# Altium PCB P-MT3620EXMSTLP-1-0.PcbDoc (part 3 of 3)
Units mm, origin at the board's own origin, x right, y up, seen from the top; angles counter-clockwise.
Board outline 50 x 80 mm, 4 copper layers (Top Layer, InternalGND, InternalPWR, Bottom Layer), stack 1.534 mm thick; 92 components, 85 nets, 375 pads, 250 vias.
Unrouted connection lines stored in the file: 17.
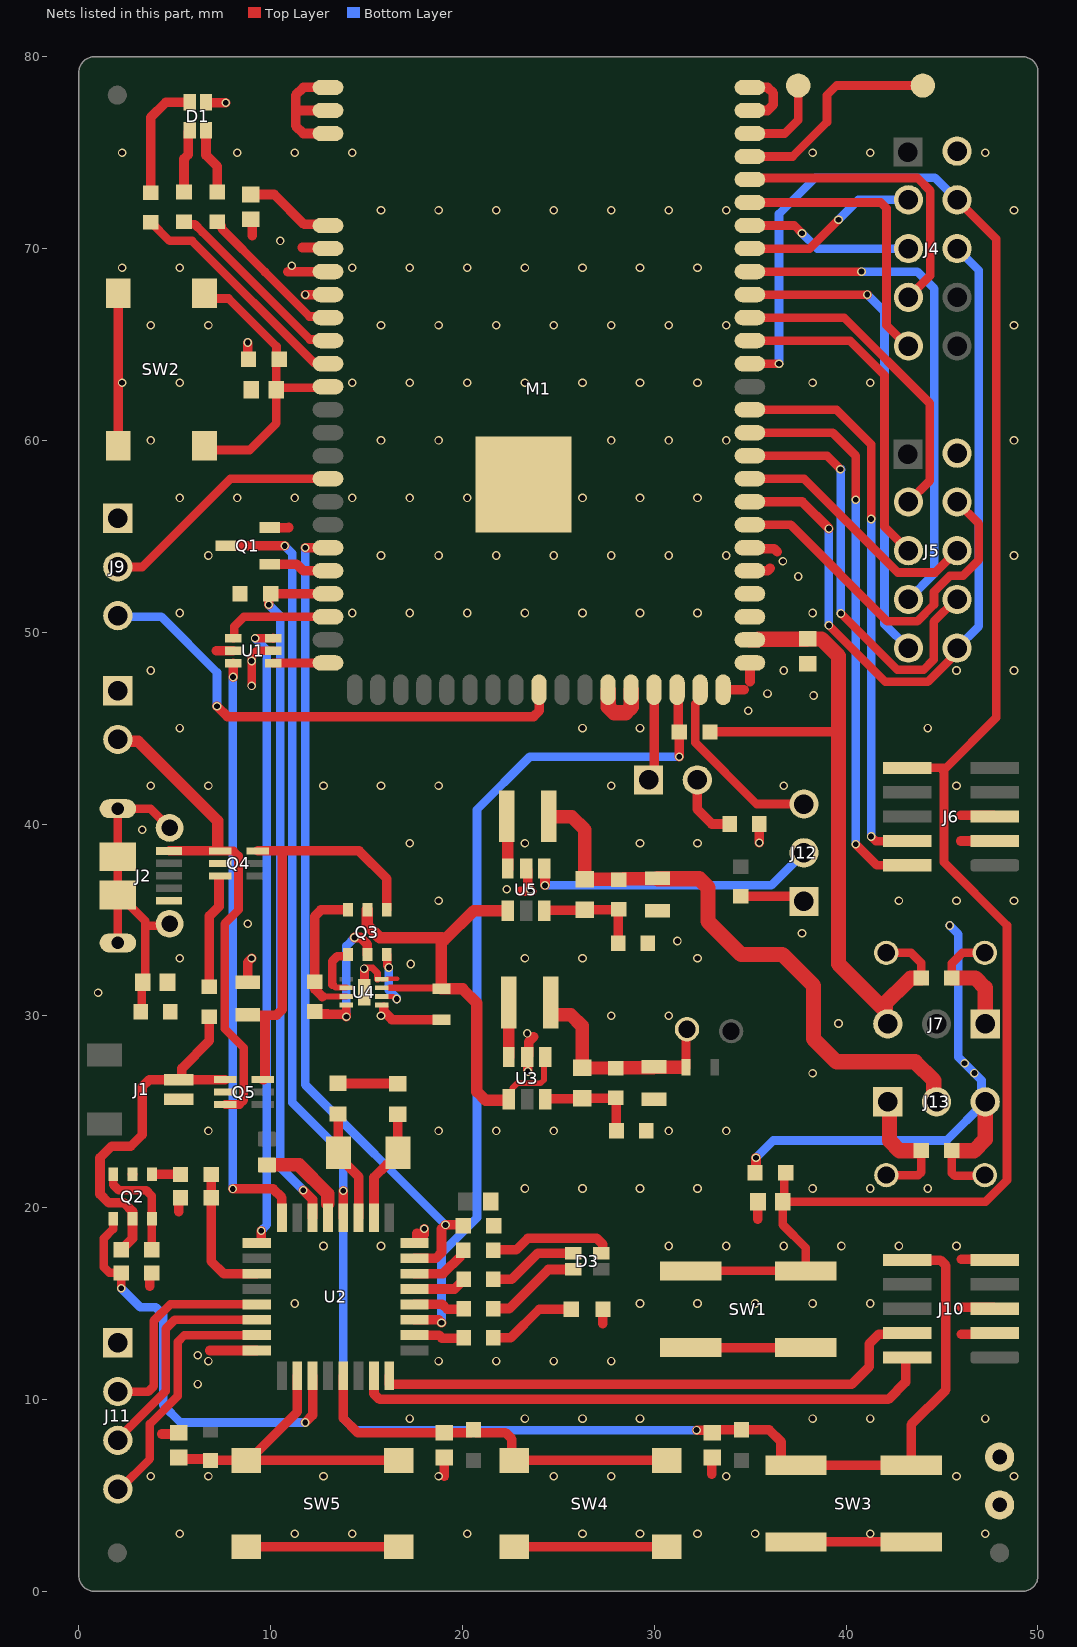
[diagram p4: the nets of this part, all layers, seen from the top]

## Via types
v1: diameter 0.45, hole 0.3, Top Layer to Bottom Layer, tented both sides, 250 vias

## Nets (pads, with @x,y where several pads share a name; then routed paths per layer and width w, separated by ;. In a path a pad name is that pad's centre, name@x,y a point inside that pad or via, vN(x,y) a via of type N, cw(c..) or ccw(c..) an arc to the next point about the centre after c; other vN are vias at no path point) (continued)
3V3_MT3620: C3.2 D1.4 J13.3 M1.2 M1.3 M1.42 M1.43 R2.2 R4.2 R27.2 TP6.1 U1.5 | length 42.3
  Top Layer w0.45: v1(9,47.2) 9,48.746 9.293,49.039 10.136,49.039 U1.5@10.138,49.037 ; R27.2@45.51,22.975 45.51,21.808 45.656,21.661 TP6.1@47.191,21.661
  Top Layer w0.5: D1.4@6.625,77.625 6.65,77.6 v1(7.657,77.6) ; v1(8.8,65.1) 8.8,64.273 R4.2@8.837,64.236 ; C3.2@8.964,71.524 9.032,71.456 9.032,70.668 ; 10.9,68.8 M1.3@12.984,68.8 ; 11.638,70.057 12.927,70.057 M1.2@12.984,70 ; M1.42@34.984,53.2 35.9,53.2 36.027,53.327 ; M1.43@34.984,54.4 35.041,54.343 36.257,54.343 36.4,54.2 ; R2.2@35.249,21.809 35.3,21.86 v1(35.3,22.6)
  Top Layer w0.6: R27.2@45.646,22.975 R27.2@45.66,22.961
  Top Layer w0.8: R27.2@45.66,22.961 46.66,22.961 47.25,23.551 J13.3@47.25,25.515
  Bottom Layer w0.45: v1(35.3,22.6) 36.2,23.5 45.234,23.5 J13.3@47.25,25.515 47.054,25.711 47.054,26.646 45.847,27.853 45.847,34.259 v1(45.4,34.706)
  other v1: 46.686,27.014 46.172,27.528 9,48.5 37.5,52.9 36.7,53.7 11.1,69.1 10.5,70.4
3V3_MT3620_RTC: C4.2 J7.3 M1.39 R3.2 R5.2 TP2.1 | length 37.8
  Top Layer w0.45: TP2.1@42.092,33.283 43.377,33.283 43.91,32.75 R3.2@43.91,31.975
  Top Layer w0.5: R5.2@32.9,44.8 39.6,44.8
  Top Layer w0.8: M1.39@34.984,49.6 35.384,49.6 35.419,49.635 37.937,49.635 37.949,49.648 C4.2@38,49.648 38.006,49.641 38.715,49.641 39.6,48.757 39.6,44.8 39.6,32.7 J7.3@42.031,30.269 ; 41.85,30.45 43.375,31.975 R3.2@43.91,31.975 ; 42.031,30.631 42.031,29.718 J7.3@42.17,29.579
BATTERY_LEVEL: R20.1 R22.2 U2.11 | length 7
  Top Layer w0.5: R20.1@6.896,21.59 6.896,20.32 6.896,17.204 7.545,16.555 U2.11@9.266,16.555
DEBUG_CTS: J5.8 M1.47 | length 22.5
  Top Layer w0.45: M1.47@34.984,59.2 39,59.2 v1(39.7,58.5) ; v1(39.725,50.978) 42.67,48.033 44.033,48.033 44.559,48.559 44.559,50.542 45.727,51.71 J5.8@45.783,51.71
  Bottom Layer w0.45: v1(39.725,50.978) v1@39.725,58.475
  Bottom Layer w0.5: v1(39.7,58.5) v1@39.725,58.475
DEBUG_RTS: J4.6 J5.10 M1.45 | length 40.3
  Top Layer w0.45: v1(39.1,50.353) 42.045,47.408 44.257,47.408 45.783,48.934 J5.10@45.783,49.17
  Top Layer w0.5: M1.45@34.984,56.8 37.7,56.8 v1(39.1,55.4)
  Bottom Layer w0.45: v1(39.1,50.353) v1(39.1,55.4) ; J5.10@45.783,49.17 46.92,50.307 46.92,68.863 J4.6@45.783,70
DEBUG_RXD: J5.4 M1.44 | length 19.2
  Top Layer w0.45: M1.44@34.984,55.6 37.105,55.6 42.132,50.573 43.714,50.573 44.579,51.439 44.579,52.114 45.411,52.947 46.087,52.947 46.92,53.779 46.92,55.653 J5.4@45.783,56.79
DEBUG_TXD: J5.6 M1.46 | length 13.3
  Top Layer w0.45: M1.46@34.984,58 37.8,58 42.687,53.113 44.646,53.113 J5.6@45.783,54.25
EXT_PMU_EN: J12.3 M1.36 | length 9.9
  Top Layer w0.45: M1.36@32.384,47 32.384,46.519 32.125,46.26 32.125,44.245 35.33,41.04 J12.3@37.8,41.04
FLASH_STM32: M1.15 R14.2 U2.31 | length 43.5
  Top Layer w0.5: v1(11.8,54.4) M1.15@12.984,54.4 ; U2.31@17.496,17.355 17.5,17.359 18.607,17.359 18.9,17.652 18.9,18.9 19.1,19.1 19.878,19.1 R14.2@19.978,19
  Bottom Layer w0.45: v1(11.8,54.4) 11.8,26.409 v1(19.11,19.099)
GND: C1.1 C2.1 C3.1 C4.1 C5.1 C6.1 C7.1 C8.1 C9.1 C10.1 C11.1 C12.1 C14.1 C16.1 C17.1 D2.1 J1.2 J2.5 J3.1 J4.2 J5.2 J6.3 J6.5 J9.1 J10.3 J10.5 J10.9 J11.1 M1.1 M1.4 M1.37 M1.38 M1.40 M1.41 M1.62 M1.63 M1.64 M1.65 M1.66 M1.67 pad.4 Q1.2 Q2.5 Q4.2 Q5.2 R1.2 R6.1 R7.1 R14.1 R22.1 R23.1 R25.1 R31.1 SW1.2 SW1.4 SW2.3 SW2.4 SW3.1 SW3.3 SW4.1 SW4.2 SW5.1 SW5.2 U1.2 U2.16 U2.32 U3.2 U4.1 U4.4 U4.9 U5.2 | length 89.9
  Top Layer w0.25: U4.4@15.794,31.908 16.019,31.908 16.044,31.933 16.591,31.933
  Top Layer w0.35: v1@14.905,32.501 15.301,32.501 15.569,32.233 U4.4@15.569,31.908
  Top Layer w0.45: U4.9@14.889,31.253 v1@14.889,32.328
  Top Layer w0.5: SW2.4@2.05,59.725 SW2.3@2.05,67.675 ; Q2.5@2.794,21.737 Q2.5@2.798,21.741 ; 3.7,15.9 3.7,16.492 R23.1@3.8,16.592 ; 4.325,8.2 5.135,8.2 C11.1@5.201,8.266 ; 5.2,19.8 5.2,20.41 R22.1@5.296,20.506 ; 6.825,12.553 7.986,12.553 ; 7.167,49.039 8.036,49.039 U1.2@8.038,49.037 ; 7.995,12.562 7.986,12.553 ; SW5.2@8.725,2.322 SW5.1@16.675,2.322 ; C16.1@8.8,31.75 8.8,32.8 v1(9,33) ; C3.1@8.964,72.819 10.181,72.819 11.743,71.257 12.927,71.257 M1.1@12.984,71.2 ; U2.16@9.266,12.555 9.264,12.553 7.986,12.553 ; Q1.2@9.943,55.453 10.941,55.453 10.945,55.456 ; v1(11.8,67.6) M1.4@12.984,67.6 ; M1.64@12.984,76 11.7,76 11.3,76.4 11.3,77.2 ; M1.65@12.984,77.2 11.3,77.2 ; M1.66@12.984,78.4 11.7,78.4 11.3,78 11.3,77.2 ; C9.1@13.512,26.484 13.524,26.472 16.607,26.472 C8.1@16.619,26.461 ; U4.1@15.894,30.433 15.894,30.218 16.312,29.8 C14.1@18.9,29.8 ; U2.32@17.496,18.155 17.619,18.155 17.623,18.159 17.623,18.663 ; 17.982,18.582 18,18.6 v1(18,18.9) ; 19.048,5.992 19.05,5.994 C10.1@19.05,6.972 ; SW4.2@22.695,2.322 SW4.1@30.645,2.322 ; 23,36.5 23.6,36.5 23.389,36.711 23.389,37.601 U5.2@23.314,37.676 ; v1(23.4,27.1) 23.4,27.584 23.434,27.618 23.365,27.687 23.4,27.722 23.368,27.754 23.4,27.786 23.382,27.804 23.4,27.822 U3.2@23.368,27.854 23.443,27.929 23.443,28.643 23.7,28.9 ; 27.309,13.95 27.309,14.666 27.3,14.675 D2.1@27.325,14.7 ; SW1.2@31.9,12.7 SW1.4@37.9,12.7 ; 33,6.1 33,6.952 C7.1@33.02,6.972 ; M1.37@33.584,47 34.678,47 ; 34.984,47.429 M1.38@34.984,48.4 ; M1.62@34.984,77.2 35.9,77.2 36.2,77.5 36.2,78.1 35.9,78.4 M1.63@34.984,78.4 ; 35.4,19.4 35.4,20.308 C2.1@35.401,20.309 ; v1(35.473,39.023) 35.473,39.947 35.5,39.975 R7.1@35.475,40 ; SW3.3@37.386,2.572 SW3.1@43.386,2.572 ; 45.981,39.117 45.982,39.116 J6.3@47.752,39.116 ; 45.985,40.447 47.691,40.447 J6.5@47.752,40.386 ; 46,13.4 47.69,13.4 J10.3@47.752,13.462 ; 46,14.8 47.684,14.8 J10.5@47.752,14.732 ; 46,17.3 47.724,17.3 J10.9@47.752,17.272
  other v1: 5.25,3 11.25,3 14.25,3 20.25,3 26.25,3 29.25,3 32.25,3 35.25,3 41.25,3 47.25,3 3.75,6 6.75,6 12.75,6 18.75,6 24.75,6 27.75,6 33.75,6 45.75,6 48.75,6 17.25,9 23.25,9 26.25,9 29.25,9 38.25,9 41.25,9 47.25,9 6.2,10.8 6.75,12 18.75,12 21.75,12 24.75,12 27.75,12 6.2,12.3 11.25,15 29.25,15 32.25,15 35.25,15 38.25,15 41.25,15 12.75,18 15.75,18 30.75,18 33.75,18 36.75,18 39.75,18 42.75,18 45.75,18 23.25,21 26.25,21 29.25,21 32.25,21 38.25,21 41.25,21 44.25,21 6.75,24 18.75,24 21.75,24 24.75,24 30.75,24 33.75,24 38.25,27 23.368,29.083 39.6,29.6 15.75,30 27.75,30 30.75,30 1,31.2 14.867,32.462 17.3,32.7 5.25,33 23.25,33 26.25,33 32.25,33 31.2,33.9 37.7,34.3 8.8,34.8 18.75,36 42.75,36 45.75,36 48.75,36 23.524,36.576 22.3,36.6 17.25,39 23.25,39 29.25,39 32.25,39 3.3,39.7 3.75,42 6.75,42 12.75,42 15.75,42 18.75,42 27.75,42 36.75,42 45.75,42 5.25,45 26.25,45 29.25,45 44.25,45 34.9,45.9 38.3,46.7 35.9,46.8 3.75,48 36.75,48 45.75,48 48.75,48 5.25,51 14.25,51 17.25,51 20.25,51 23.25,51 26.25,51 29.25,51 32.25,51 38.25,51 6.75,54 15.75,54 18.75,54 21.75,54 24.75,54 27.75,54 30.75,54 33.75,54 48.75,54 5.25,57 8.25,57 11.25,57 14.25,57 17.25,57 20.25,57 26.25,57 29.25,57 32.25,57 3.75,60 15.75,60 18.75,60 27.75,60 30.75,60 33.75,60 48.75,60 2.25,63 5.25,63 14.25,63 17.25,63 20.25,63 23.25,63 26.25,63 29.25,63 32.25,63 38.25,63 41.25,63 3.75,66 6.75,66 15.75,66 18.75,66 21.75,66 24.75,66 27.75,66 30.75,66 33.75,66 48.75,66 2.25,69 5.25,69 14.25,69 17.25,69 20.25,69 23.25,69 26.25,69 29.25,69 32.25,69 15.75,72 18.75,72 21.75,72 24.75,72 27.75,72 30.75,72 33.75,72 48.75,72 2.25,75 8.25,75 11.25,75 14.25,75 38.25,75 41.25,75 47.25,75
MEASURE_BATTERY: Q2.1 R23.2 U2.19 | length 22.4
  Top Layer w0.45: Q2.1@1.784,19.411 1.78,19.407 1.78,18.88 1.3,18.4 1.3,16.893 1.593,16.6 2.192,16.6 R23.2@2.2,16.592 2.2,16.442 v1(2.2,15.8)
  Top Layer w0.5: v1(11.8,8.8) 12.181,9.181 U2.19@12.181,11.24
  Bottom Layer w0.45: v1(2.2,15.8) 3.2,14.8 4,14.8 4.4,14.4 4.4,9.7 5.3,8.8 v1(11.8,8.8)
MT3620_BUTTON_A: C5.2 M1.8 R4.1 SW2.1 SW2.2 | length 16
  Top Layer w0.45: SW2.2@6.568,59.525 6.593,59.5 8.9,59.5 10.285,60.885 C5.2@10.285,62.651 ; SW2.1@6.568,67.475 6.643,67.4 7.8,67.4 10.3,64.9 10.3,64.373 R4.1@10.437,64.236 10.285,64.084 C5.2@10.285,62.651 ; M1.8@12.984,62.8 12.927,62.743 10.376,62.743 C5.2@10.285,62.651
MT3620_LED_B: M1.7 R9.2 | length 12.3
  Top Layer w0.45: R9.2@3.735,71.367 3.76,71.367 4.727,70.4 5.9,70.4 12.243,64.057 12.927,64.057 M1.7@12.984,64
MT3620_LED_G: M1.5 R8.1 | length 7.9
  Top Layer w0.45: R8.1@7.22,71.397 7.245,71.397 7.451,71.191 7.451,71.03 9.7,68.781 12.023,66.457 12.927,66.457 M1.5@12.984,66.4
MT3620_LED_R: M1.6 R10.1 | length 10.1
  Top Layer w0.45: R10.1@5.476,71.397 5.607,71.266 6.034,71.266 6.438,70.862 ; 6.438,70.861 12.041,65.257 12.927,65.257 M1.6@12.984,65.2
MT3620_RX: M1.20 U1.4 | length 2.8
  Top Layer w0.45: U1.4@10.144,48.394 M1.20@12.978,48.394
MT3620_SPARE1: J9.2 M1.12 | length 12.7
  Top Layer w0.45: J9.2@2.2,53.4 3.3,53.4 7.9,58 M1.12@12.984,58
MT3620_SPARE2: J9.3 M1.29 | length 26.4
  Top Layer w0.5: v1(7.2,46.14) 7.74,45.6 23.7,45.6 24,45.9 24,46.984 M1.29@23.984,47
  Bottom Layer w0.45: J9.3@2.025,50.86 2.086,50.8 4.3,50.8 7.2,47.9 v1(7.2,46.14)
MT3620_SWCLK: J6.4 M1.49 | length 29.5
  Top Layer w0.45: M1.49@34.984,61.6 39.5,61.6 41.3,59.8 v1(41.3,55.9) ; v1(41.3,39.35) 41.55,39.1 43.164,39.1 J6.4@43.18,39.116
  Bottom Layer w0.45: v1(41.3,39.35) v1(41.3,55.9)
MT3620_SWDIO: J6.2 M1.48 | length 29.5
  Top Layer w0.45: M1.48@35.041,60.343 M1.48@34.984,60.4 39.3,60.4 40.5,59.2 v1(40.5,56.9) ; v1(40.5,38.942) 41.596,37.846 J6.2@43.18,37.846
  Bottom Layer w0.45: v1(40.5,38.942) v1(40.5,56.9)
MT3620_SYSRST_N: C2.2 J4.4 J6.10 M1.51 R2.1 SW1.1 SW1.3 | length 100
  Top Layer w0.45: SW1.1@31.9,16.7 SW1.3@37.9,16.7 37.9,17.898 36.697,19.102 C2.2@36.697,20.309 ; M1.51@34.984,64 v1(36.5,64) ; R2.1@36.849,21.809 36.773,21.733 36.773,20.385 C2.2@36.697,20.309 ; J6.10@43.18,42.926 44.9,42.926 45.2,42.926 47.825,45.551 47.825,70.498 J4.4@45.783,72.54 ; 45.05,42.776 45.1,42.726 45.1,38 48.387,34.713 48.387,21.429 47.267,20.309 C2.2@36.697,20.309
  Bottom Layer w0.45: v1(36.5,64) 36.5,71.8 38.4,73.7 44.623,73.7 J4.4@45.783,72.54
MT3620_TX: M1.18 U1.1 | length 5.8
  Top Layer w0.45: U1.1@8.038,49.687 8.075,49.687 8.1,49.712 8.1,50.3 8.6,50.8 M1.18@12.984,50.8
NetC1_2: C1.2 J2.6 J2.7 J2.8 J2.9 J2.10 R1.1 | length 18
  Top Layer w0.45: J2.9@2.028,33.798 J2.6@2.028,36.298 J2.6@2.028,38.299 J2.10@2.028,40.799 3.728,40.799 J2.8@4.728,39.799 ; J2.6@2.125,36.277 3.454,34.948 3.454,34.7 ; R1.1@3.213,30.209 3.268,30.264 3.268,31.695 C1.2@3.323,31.75 ; C1.2@3.375,31.857 3.454,31.936 3.454,34.7 ; J2.7@4.728,34.799 4.63,34.7 3.454,34.7
NetC8_2: C8.2 U2.2 X1.1 | length 6
  Top Layer w0.5: U2.2@15.381,19.47 15.385,19.474 15.385,21.585 16.054,22.254 16.221,22.254 16.631,22.665 X1.1@16.631,22.855 16.625,22.861 16.625,24.855 C8.2@16.619,24.861
NetC9_2: C9.2 U2.3 X1.2 | length 5.9
  Top Layer w0.5: C9.2@13.512,24.884 13.522,24.874 13.522,22.865 X1.2@13.532,22.855 13.532,22.665 14.581,21.616 U2.3@14.581,19.47
NetC12_2: C12.2 C13.2 L1.2 R21.1 R24.2 TP3.1 | length 11.9
  Top Layer w0.45: R21.1@31.651,27.319 TP3.1@31.651,29.251
  Top Layer w0.7: L1.2@24.6,30.7 24.6,30.11 24.65,30.06 25.64,30.06 26.229,29.471 C13.2@26.229,27.293 26.242,27.28 27.966,27.28 R24.2@27.979,27.268 28.004,27.293 29.954,27.293 29.979,27.319 R21.1@31.526,27.319
NetC13_1: C13.1 R24.1 R25.2 U3.6 | length 5.4
  Top Layer w0.5: U3.6@24.318,25.654 24.337,25.673 26.21,25.673 C13.1@26.229,25.693 26.242,25.706 27.966,25.706 R24.1@27.979,25.718 28.002,25.695 28.002,24.023 R25.2@28.025,24
NetC14_2: C14.2 Q3.5 U3.1 U3.4 U4.3 U5.4 | length 26.7
  Top Layer w0.3: U3.4@22.418,25.654 22.593,25.829 22.593,26.221 22.856,26.484 24.067,26.484 24.243,26.66 24.243,27.779 U3.1@24.318,27.854
  Top Layer w0.36: 16.225,31.463 16.58,31.463 16.585,31.458 18.842,31.458 C14.2@18.9,31.4
  Top Layer w0.5: Q3.5@15.038,35.522 Q3.5@15.042,35.518
  Top Layer w0.6: Q3.5@15.042,35.518 15.042,34.71 15.677,34.075 18.925,34.075 19.05,33.95 ; U5.4@22.364,35.476 20.576,35.476 19.05,33.95 ; U3.4@22.418,25.654 22.418,25.625 22.393,25.6 21.2,25.6 20.75,26.05 20.75,30.65 20,31.4 C14.2@18.9,31.4 18.9,33.8 19.05,33.95
NetC15_1: C15.1 R29.1 R31.2 U5.6 | length 5.7
  Top Layer w0.5: U5.6@24.264,35.476 24.287,35.499 26.339,35.499 C15.1@26.362,35.522 26.375,35.535 R29.1@28.127,35.535 ; R31.2@28.115,33.782 28.127,33.795 R29.1@28.127,35.535 ; R29.1@28.14,35.547 R29.1@28.127,35.535
NetC15_2: C15.2 C17.2 J13.2 L2.2 R29.2 | length 31.2
  Top Layer w0.7: L2.2@24.5,40.386 25.686,40.386 26.362,39.71 C15.2@26.362,37.122 26.375,37.109 28.127,37.109 R29.2@28.14,37.097 28.171,37.128 28.378,37.128 28.398,37.148 C17.2@30.172,37.148
  Top Layer w0.8: C17.2@30.172,37.148 32.331,37.148 32.8,36.679 32.8,34.926 34.526,33.2 36.674,33.2 38.3,31.574 38.3,28.8 39.5,27.6 43.6,27.6 44.569,26.631 44.569,26.169 44.571,26.166 44.571,25.654 J13.2@44.71,25.515
NetC16_2: C16.2 Q3.4 Q4.6 Q5.6 | length 22.6
  Top Layer w0.5: C16.2@8.8,30.05 8.816,30.034 9.7,30.034 ; Q4.6@9.317,38.595 10.5,38.595 ; Q5.6@9.585,26.672 9.628,26.672 9.7,26.744 9.7,30.034 ; Q3.4@16.048,35.522 16.048,37.152 14.605,38.595 10.5,38.595 ; 9.7,30.034 10.307,30.034 10.6,30.327 10.6,38.495 10.5,38.595
NetD1_1: D1.1 R8.2 | length 3.5
  Top Layer w0.5: D1.1@6.625,76.175 6.625,74.875 7.22,74.28 R8.2@7.22,72.946
NetD1_2: D1.2 R10.2 | length 3.4
  Top Layer w0.5: R10.2@5.476,72.946 5.476,74.676 5.7,74.9 5.7,76.1 D1.2@5.775,76.175
NetD1_3: D1.3 R9.1 | length 6.3
  Top Layer w0.5: R9.1@3.735,72.916 3.735,76.835 4.525,77.625 D1.3@5.775,77.625
NetD2_2: D2.2 R11.1 | length 4.7
  Top Layer w0.5: R11.1@21.603,13.208 22.508,13.208 24,14.7 D2.2@25.675,14.7
NetD3_1: D3.1 R16.2 | length 5
  Top Layer w0.5: R16.2@21.603,14.732 21.612,14.741 22.441,14.741 24.475,16.775 D3.1@25.775,16.775
NetD3_2: D3.2 R17.2 | length 4.7
  Top Layer w0.5: R17.2@21.603,16.256 22.556,16.256 23.925,17.625 D3.2@25.775,17.625
NetD3_3: D3.3 R18.1 | length 6.6
  Top Layer w0.5: R18.1@21.59,17.78 21.61,17.8 22.8,17.8 23.4,18.4 27,18.4 27.3,18.1 27.3,17.7 D3.3@27.225,17.625
NetFB1_2: FB1.2 U2.5 | length 4.3
  Top Layer w0.7: FB1.2@9.8,22.225 11.475,22.225 12.981,20.719 U2.5@12.981,20.2
NetIO0_TXD_1: IO0_TXD.1 M1.60 | length 11.4
  Top Layer w0.45: M1.60@34.984,74.8 37.2,74.8 39,76.6 39,78 39.5,78.5 IO0_TXD.1@44,78.5
NetIO1_TXD_1: IO1_TXD.1 M1.61 | length 4.6
  Top Layer w0.45: M1.61@34.984,76 36.8,76 37.5,76.7 IO1_TXD.1@37.5,78.5
NetJ7_1: J7.1 R3.1 TP1.1 | length 6.5
  Top Layer w0.45: R3.1@45.51,31.975 45.51,32.727 46.065,33.283 TP1.1@47.224,33.283
  Top Layer w0.8: R3.1@45.51,31.975 46.73,31.975 47.25,31.455 J7.1@47.25,29.579
NetJ8_1: J8.1 M1.34 | length 4.8
  Top Layer w0.5: J8.1@29.7,42.3 29.984,42.584 M1.34@29.984,47
NetJ8_2: J8.2 R7.2 | length 3.5
  Top Layer w0.5: J8.2@32.24,42.3 32.24,40.76 33,40 R7.2@33.925,40
NetJ12_1: J12.1 R28.1 | length 3.4
  Top Layer w0.5: R28.1@34.5,36.225 37.535,36.225 J12.1@37.8,35.96
NetJ12_2: J12.2 U5.1 | length 15.1
  Top Layer w0.5: U5.1@24.264,37.676 24.3,37.64 v1(24.3,36.8)
  Bottom Layer w0.45: v1(24.3,36.8) 36.1,36.8 J12.2@37.8,38.5
NetJ13_1: J13.1 R27.1 TP5.1 | length 6.9
  Top Layer w0.45: TP5.1@42.095,21.696 43.763,21.696 43.91,21.842 R27.1@43.91,22.975
  Top Layer w0.6: J13.1@42.17,25.515 J13.1@42.256,25.429 ; R27.1@43.81,22.961 R27.1@43.824,22.975
  Top Layer w0.8: J13.1@42.256,25.429 42.256,23.487 42.782,22.961 R27.1@43.81,22.961
NetL1_1: L1.1 U3.3 | length 2.9
  Top Layer w0.6: L1.1@22.4,30.7 22.416,30.684 22.416,28.086 22.418,28.084 U3.3@22.418,27.854
NetL2_1: L2.1 U5.3 | length 2.8
  Top Layer w0.6: L2.1@22.214,40.386 22.364,40.236 U5.3@22.364,37.676
NetM1_32: M1.32 M1.33 | length 3.3
  Top Layer w0.8: M1.32@27.584,47 27.6,46.984 27.6,46.1 27.9,45.8 28.5,45.8 28.8,46.1 28.8,46.984 M1.33@28.784,47
NetQ2_3: Q2.3 Q2.6 R19.1 | length 5.6
  Top Layer w0.45: Q2.6@1.784,21.737 1.788,21.733 1.788,21.193 2.081,20.9 3.507,20.9 3.8,20.607 3.8,19.415 Q2.3@3.804,19.411 3.802,19.409 3.802,17.802 R19.1@3.8,17.8
NetQ2_4: Q2.4 R20.2 | length 1.5
  Top Layer w0.5: Q2.4@3.804,21.737 3.804,21.735 3.808,21.731 R20.2@5.296,21.731
NetQ3_1: Q3.1 U4.6 | length 3
  Top Layer w0.3: 13.222,31.63 13.378,31.473 U4.6@13.944,31.473
  Top Layer w0.45: 13.222,31.63 13.2,31.651 13.2,32.839 13.464,33.102 13.999,33.102 14.028,33.131 Q3.1@14.028,33.196
NetQ3_2: Q3.2 R26.1 U4.8 | length 7.8
  Top Layer w0.45: v1@13.944,30.092 13.944,30.425
  Top Layer w0.5: R26.1@12.3,30.225 12.431,30.094 12.96,30.094 12.963,30.092 13.944,30.092 v1(13.944,29.952) ; v1(14.367,34.083) 14.679,34.083 15.034,33.728 15.034,33.2 Q3.2@15.038,33.196
  Bottom Layer w0.45: v1(13.944,29.952) 13.944,33.644 14.367,34.067 v1(14.367,34.083)
NetQ3_3: Q3.3 U4.2 | length 3.3
  Top Layer w0.25: U4.2@15.794,31.008 16.391,31.008 v1@16.521,30.878
  Top Layer w0.45: Q3.3@16.048,33.196 16.077,33.167 16.077,32.602 v1(16.161,32.518)
  Bottom Layer w0.45: v1(16.161,32.518) 16.161,31.346 16.575,30.932 v1(16.575,30.878)
NetQ3_6: Q3.6 R26.2 U4.7 | length 7.5
  Top Layer w0.3: 12.686,31.008 U4.7@13.944,31.008
  Top Layer w0.5: 12.686,31.008 12.3,31.394 R26.2@12.3,31.775 12.3,35.2 12.622,35.522 Q3.6@14.028,35.522
NetQ4_3: Q4.3 R30.2 | length 5.9
  Top Layer w0.5: R30.2@6.804,31.509 6.804,35.204 7.3,35.7 Q4.3@7.3,37.192
RECOVERY_CTS: J4.7 M1.59 | length 15.7
  Top Layer w0.45: M1.59@34.984,73.6 35.041,73.657 35.654,73.657 35.673,73.677 43.714,73.677 44.38,73.011 44.38,68.597 J4.7@43.243,67.46
RECOVERY_RTS: J4.9 M1.58 | length 14.9
  Top Layer w0.45: M1.58@34.984,72.4 41.807,72.4 42.1,72.107 42.1,66 43.18,64.92 J4.9@43.243,64.92
RECOVERY_RXD: J4.3 M1.56 | length 9.3
  Top Layer w0.45: M1.56@34.984,70 38.1,70 v1(39.6,71.5)
  Bottom Layer w0.45: v1(39.6,71.5) 40.64,72.54 J4.3@43.243,72.54
RECOVERY_TXD: J4.5 M1.57 | length 8.8
  Top Layer w0.45: M1.57@34.984,71.2 37.3,71.2 v1(37.7,70.8)
  Bottom Layer w0.45: v1(37.7,70.8) 38.5,70 J4.5@43.243,70
RESET_STM32: M1.16 Q1.1 | length 3.2
  Top Layer w0.5: Q1.1@9.943,53.548 11.352,53.548 11.7,53.2 M1.16@12.984,53.2
SERVICE_CTS: J5.7 M1.55 | length 26.7
  Top Layer w0.45: M1.55@34.984,68.8 v1(40.8,68.8)
  Bottom Layer w0.45: v1(40.8,68.8) 43.7,68.8 44.6,67.9 44.6,53.067 J5.7@43.243,51.71
SERVICE_RTS: J5.9 M1.54 | length 25.4
  Top Layer w0.45: M1.54@34.984,67.6 v1(41.1,67.6)
  Bottom Layer w0.45: v1(41.1,67.6) 42,66.7 42,50.413 J5.9@43.243,49.17
SERVICE_RXD: J5.3 M1.53 | length 16.8
  Top Layer w0.45: M1.53@34.984,66.4 39.884,66.4 44.354,61.93 44.354,57.902 J5.3@43.243,56.79
SERVICE_TXD: J5.5 M1.52 | length 17.4
  Top Layer w0.45: M1.52@34.984,65.2 40.2,65.2 42,63.4 42,55.493 J5.5@43.243,54.25
ST_SWCLK: J10.4 U2.24 | length 29.2
  Top Layer w0.5: U2.24@16.181,11.24 16.181,10.804 16.185,10.8 40.3,10.8 41.2,11.7 41.2,12.9 41.695,13.394 43.112,13.394 J10.4@43.18,13.462
ST_SWDIO: J10.2 U2.23 | length 30.5
  Top Layer w0.5: U2.23@15.381,11.24 15.385,11.236 15.385,10.293 15.678,10 42.2,10 43.1,10.9 43.1,12.124 43.168,12.192 J10.2@43.18,12.192
STM32_BUTTON_A: C11.2 R15.1 SW5.3 SW5.4 U2.18 | length 17
  Top Layer w0.5: C11.2@5.201,6.971 5.276,6.895 6.783,6.895 R15.1@6.858,6.82 6.859,6.821 8.851,6.821 SW5.4@8.852,6.822 ; U2.18@11.381,11.24 11.381,9.351 SW5.4@8.852,6.822 ; SW5.3@16.675,6.822 SW5.4@8.852,6.822
STM32_BUTTON_B: C10.2 R13.1 SW4.3 SW4.4 U2.21 | length 20.6
  Top Layer w0.5: U2.21@13.781,11.24 13.781,9.019 14.532,8.268 C10.2@19.05,8.268 20.422,8.268 R13.1@20.574,8.42 20.724,8.27 22.23,8.27 22.573,7.927 22.573,6.944 SW4.4@22.695,6.822 ; SW4.4@22.8,6.822 SW4.3@30.645,6.822
STM32_LED_B: R18.2 U2.30 | length 3.1
  Top Layer w0.5: U2.30@17.496,16.555 18.982,16.555 19.91,17.482 19.91,17.649 R18.2@20.041,17.78
STM32_LED_ERROR: R11.2 U2.26 | length 2.6
  Top Layer w0.5: U2.26@17.496,13.355 17.5,13.351 18.771,13.351 18.922,13.2 19.922,13.2 19.93,13.208 R11.2@20.053,13.208
STM32_LED_G: R17.1 U2.29 | length 2.8
  Top Layer w0.5: U2.29@17.496,15.755 19.578,15.755 20.053,16.231 R17.1@20.053,16.256
STM32_LED_R: R16.1 U2.28 | length 2.7
  Top Layer w0.5: U2.28@17.496,14.955 18.945,14.955 19.2,14.7 20.021,14.7 R16.1@20.053,14.732
STM32_RESET: C7.2 J10.10 Q1.3 R12.1 SW3.2 SW3.4 U2.4 | length 95.8
  Top Layer w0.5: Q1.3@7.657,54.5 v1(10.73,54.5) ; v1(13.78,20.884) 13.78,19.471 U2.4@13.781,19.47 ; v1(32.2,8.4) 32.888,8.4 C7.2@33.02,8.268 33.172,8.42 35.98,8.42 36.6,7.8 36.6,6.822 36.85,6.572 SW3.4@37.386,6.572 SW3.2@43.386,6.572 43.386,8.686 45.2,10.5 45.2,16.974 44.907,17.266 43.186,17.266 J10.10@43.18,17.272
  Bottom Layer w0.45: v1(10.73,54.5) 11.125,54.105 11.125,25.475 13.78,22.82 v1(13.78,20.884) 13.78,9.02 14.4,8.4 v1(32.2,8.4)
STM32_RX: U1.6 U2.9 | length 33.1
  Top Layer w0.45: v1(9.185,49.684) U1.6@10.135,49.684
  Top Layer w0.5: U2.9@9.266,18.155 9.496,18.155 9.5,18.159 v1(9.5,18.8) ; U1.6@10.135,49.684 U1.6@10.138,49.687
  Bottom Layer w0.45: v1(9.185,49.684) 9.8,49.069 9.8,19.1 v1(9.5,18.8)
STM32_SPARE_1: J11.2 U2.13 | length 11.1
  Top Layer w0.45: J11.2@2.025,10.409 2.035,10.4 3.607,10.4 3.9,10.693 3.9,14.1 4.755,14.955 U2.13@9.266,14.955
STM32_SPARE_2: J11.3 U2.14 | length 11.8
  Top Layer w0.45: J11.3@2.025,7.869 2.025,7.934 4.525,10.434 4.525,13.687 4.993,14.155 U2.14@9.266,14.155
STM32_SPARE_3: J11.4 U2.15 | length 13.3
  Top Layer w0.45: J11.4@2.025,5.329 2.129,5.329 3.7,6.9 3.7,8.725 5.15,10.175 5.15,13 5.505,13.355 U2.15@9.266,13.355
STM32_TX: U1.3 U2.8 | length 31.2
  Top Layer w0.5: v1(8.025,20.975) 10.125,20.975 10.577,20.523 10.577,19.474 U2.8@10.581,19.47 ; v1(8.038,47.662) U1.3@8.038,48.387
  Bottom Layer w0.45: v1(8.025,20.975) 8.025,47.649 v1(8.038,47.662)
V_BAT: J1.1 Q2.2 Q5.1 R19.2 R30.1 | length 19.9
  Top Layer w0.5: R19.2@2.2,17.8 2.79,18.39 2.79,19.407 Q2.2@2.794,19.411 2.79,19.415 2.79,19.807 2.344,20.254 1.546,20.254 1.1,20.7 1.1,22.6 1.7,23.2 2.7,23.2 3.3,23.8 3.3,26.307 3.655,26.662 J1.1@5.207,26.662 ; R30.1@6.804,29.959 6.804,28.704 5.363,27.263 5.363,26.712 5.313,26.662 J1.1@5.207,26.662 ; Q5.1@7.629,26.672 7.624,26.667 5.687,26.667 5.212,26.667 J1.1@5.207,26.662
V_USB: J2.1 J3.2 Q4.1 Q5.3 | length 26.7
  Top Layer w0.45: Q4.1@7.361,38.595 8.057,38.595 8.321,38.331 8.321,35.521 7.594,34.794 7.594,29.334 8.6,28.327 8.6,25.6 8.374,25.374 Q5.3@7.631,25.374
  Top Layer w0.5: J2.1@4.7,38.602 J2.1@4.703,38.599 7.361,38.599 Q4.1@7.361,38.595
  Top Layer w0.6: J3.2@2.025,44.409 2.118,44.317 3.083,44.317 7.243,40.157 Q4.1@7.243,38.717
WAKE_MT3620: M1.35 R5.1 U2.27 | length 44.2
  Top Layer w0.5: U2.27@17.496,14.155 18.745,14.155 v1(18.9,14) ; M1.35@31.184,47 31.241,46.943 31.241,44.859 R5.1@31.3,44.8 v1(31.3,43.5)
  Bottom Layer w0.45: v1(18.9,14) 18.9,17.616 20.75,19.466 20.75,40.75 23.5,43.5 v1(31.3,43.5)
WAKE_STM32: M1.17 R6.2 U2.6 | length 36.5
  Top Layer w0.5: v1(9.9,51.425) 9.9,51.9 R6.2@10,52 M1.17@12.984,52 ; v1(11.7,20.9) 12.177,20.423 12.177,19.474 U2.6@12.181,19.47
  Bottom Layer w0.45: v1(9.9,51.425) 10.5,50.825 10.5,22.1 v1(11.7,20.9)
pads on no net: J1. J2.2 J2.3 J2.4 J4.1 J4.8 J4.10 J5.1 J6.1 J6.6 J6.7 J6.8 J6.9 J10.6 J10.7 J10.8 M1.9 M1.10 M1.11 M1.13 M1.14 M1.19 M1.21 M1.22 M1.23 M1.24 M1.25 M1.26 M1.27 M1.28 M1.30 M1.31 M1.50 Q4.4 Q4.5 Q5.4 Q5.5 U2.7 U2.10 U2.12 U2.20 U2.22 U2.25 U3.5 U4.5 U5.5

## Polygon pours and split planes (outlines as drawn)
GND on Top Layer "TopGND" (solid, pour order 22): 49.182,0 ccw(c49.182,0.8) 49.982,0.8 49.982,79.2 ccw(c49.182,79.2) 49.182,80 0.782,80 ccw(c0.781,79.2) -0.018,79.2 -0.018,0.8 ccw(c0.781,0.8) 0.782,0
3V3_MT3620 on Top Layer "3V3_MT3620_L01_P015" (solid, remove dead copper, pour order 15): 7.88,72.172 7.881,72.171 7.881,71.064 10.745,68.2 14.2,68.2 14.2,70.6 11.685,70.6 10.116,72.17
3V3_MT3620 on Top Layer "3V3_MT3620_L01_P013" (solid, remove dead copper, pour order 13): 33.5,55 36.5,55 39,52.5 33.5,52.5
3V3_MT3620 on Top Layer "3V3_MT3620_L01_P012" (solid, remove dead copper, pour order 12): 45.744,27.861 45.744,23.861 48.744,23.861 48.744,27.861
3V3_AON on Top Layer "3V3_AON_L01_P011" (solid, remove dead copper, pour order 11): 33.1,31 36.747,31 36.747,26 33.1,26
GND on Top Layer "GND_L01_P020" (solid, remove dead copper, pour order 20): 10.7,13 10.7,12.228 5.904,12.228 5.904,13
GND on Top Layer "GND_L01_P019" (solid, remove dead copper, pour order 19): 3.698,26.163 8.2,26.163 8.2,24.51 3.703,24.51
GND on Top Layer "GND_L01_P018" (solid, remove dead copper, pour order 18): 7.651,30.683 9.9,30.675 9.9,33.798 7.639,33.803
GND on Top Layer "GND_L01_P017" (solid, remove dead copper, pour order 17): 1,49.5 9,49.5 9,48.5 6.8,48.5 6.8,45.7 1,45.7
GND on Top Layer "GND_L01_P021" (solid, remove dead copper, pour order 21): 3.849,36.4 3.849,29 6.2,29 6.2,35.2 6.9,35.9 6.9,37.6 8,37.6 8,38.2 5.8,38.2 5.628,38.028 5.628,36.4
GND on Bottom Layer "BotGND" (solid, remove dead copper, pour order 25): 49.2,0 ccw(c49.2,0.8) 50,0.8 50,79.2 ccw(c49.2,79.2) 49.2,80 0.8,80 ccw(c0.8,79.2) 0,79.2 0,0.8 ccw(c0.8,0.8) 0.8,0
GND on InternalGND (split plane): 0.8,79.49 14.974,79.49 14.974,73 14.983,72.9 15.012,72.805 15.06,72.716 15.123,72.639 15.2,72.576 15.289,72.528 15.384,72.499 15.484,72.49 32.484,72.49 32.584,72.499 32.679,72.528 32.768,72.576 32.845,72.639 32.908,72.716 32.956,72.805 32.985,72.9 32.994,73 32.994,79.49 49.2,79.49 49.229,79.49 49.284,79.478 49.337,79.457 49.385,79.425 49.425,79.385 49.457,79.337 49.478,79.284 49.49,79.229 49.49,79.2 49.49,0.8 49.49,0.771 49.478,0.716 49.457,0.663 49.425,0.615 49.385,0.575 49.337,0.543 49.284,0.522 49.229,0.51 0.8,0.51 0.771,0.51 0.716,0.522 0.663,0.543 0.615,0.575 0.575,0.615 0.543,0.663 0.522,0.716 0.51,0.771 0.51,0.8 0.51,79.2 0.51,79.229 0.522,79.284 0.543,79.337 0.575,79.385 0.615,79.425 0.663,79.457 0.716,79.478 0.771,79.49
3V3_MT3620 on InternalPWR (split plane): 0.8,79.49 14.974,79.49 14.974,73 14.983,72.9 15.012,72.805 15.06,72.716 15.123,72.639 15.2,72.576 15.289,72.528 15.384,72.499 15.484,72.49 32.484,72.49 32.584,72.499 32.679,72.528 32.768,72.576 32.845,72.639 32.908,72.716 32.956,72.805 32.985,72.9 32.994,73 32.994,79.49 49.2,79.49 49.229,79.49 49.284,79.478 49.337,79.457 49.385,79.425 49.425,79.385 49.457,79.337 49.478,79.284 49.49,79.229 49.49,79.2 49.49,31.759 0.51,31.759 0.51,79.2 0.51,79.229 0.522,79.284 0.543,79.337 0.575,79.385 0.615,79.425 0.663,79.457 0.716,79.478 0.771,79.49
3V3_AON on InternalPWR (split plane): 49.49,0.8 49.49,0.771 49.478,0.716 49.457,0.663 49.425,0.615 49.385,0.575 49.337,0.543 49.284,0.522 49.229,0.51 0.8,0.51 0.771,0.51 0.716,0.522 0.663,0.543 0.615,0.575 0.575,0.615 0.543,0.663 0.522,0.716 0.51,0.771 0.51,0.8 0.51,31.5 49.49,31.5

## Other copper
InternalPWR (plane layer: these items are gaps in the copper):
  lines w0.254: -0.009,31.63 49.991,31.63

## Silkscreen, mask and mechanical layers (free items; w line width, h text height)
Top Overlay:
  circle w0.2: c44.196,0.762 r0.1
  rectangle: 21.7,42.349 27.2,45.5
  lines w0.1: 33.169,40.5 33.172,40.497 ; 33.3,23 33.3,23 ; 33.3,23 33.3,23
  lines w0.2: 4.1,51.3 7.4,51.3 ; 4.1,52.6 7.4,52.6 ; 4.3,2.2 7.1,2.2 ; 4.3,3.495 7.118,3.495 ; 4.3,4.8 7.1,4.8 ; 4.671,46 7.4,46 ; 28,27.92 28,29.4 ; 31.2,39.1 31.2,40.4 ; 32.678,33.404 33.278,34.004 ; 32.7,23.6 33.3,23 ; 33.169,40.5 26.8,40.5 26.8,39.1 33.172,39.1 33.172,40.497 ; 33.7,23 34,23 34.3,23.3 34.85,22.75 35.4,23.3 36,22.7 36.3,23 36.6,23 ; 33.7,34 34,34 34.3,34.3 34.9,33.7 35.45,34.25 36,33.7 36.3,34 36.6,34 ; 33.9,30.9 33.9,33.1 ; 34.1,24 34.1,26.5 ; 34.4,43.9 40,43.9 ; 34.4,45.1 40,45.1 ; 36.2,31 36.2,33 ; 36.4,24.1 36.4,26.5 ; 36.978,34.004 37.578,33.404 ; 37,23 37.6,23.6 ; 37.2,30.9 37.8,30.3 ; 40.953,29.347 40.002,30.298 ; 37.8,30.3 37.8,30.3 ; 37.8,30.3 40.002,30.3 ; 40.002,30.298 40.002,30.3 ; 40.002,30.298 40.002,30.3 ; 4,50.2 4,53.8 7.4,53.8 7.4,50.2 4,50.2 ; 4.2,0.8 4.2,6.1 7.2,6.1 7.2,0.8 4.2,0.8 ; 4.571,44.8 4.571,47.3 7.44,47.3 7.44,44.8 4.571,44.8 ; 31,24 31,26.6 40.2,26.6 40.2,24 31,24 ; 31.3,30.9 31.3,33.1 39.3,33.1 39.3,30.9 31.3,30.9 ; 34.3,42.6 34.3,46.3 40.1,46.3 40.1,42.6 34.3,42.6
  text "MT3620 - LEDs" at 3.6,78.514 h1.25
  text "MT3620 - A" at 1.5,68.814 h1.25
  text "MT3620 -" at 37.183,67.3 h1.52 r90
  text "RECOVERY" at 38.784,66.7 h1.52 r90
  text "MT3620 - SPARE" at 0.626,57.483 h1.3
  text "MT3620 -" at 37.283,53.7 h1.52 r90
  text "GND" at 4.8,52.91 h1
  text "GPIO 9" at 4.3,51.71 h1
  text "GPIO41" at 4.2,50.41 h1
  text "SERVICE, DEBUG" at 38.538,50.285 h1.52 r90
  text "GND" at 4.9,46.312 h1.2
  text "EXT_PMU_EN" at 33.418,45.3 h0.9
  text "5V" at 5.4,45.012 h1.2
  text "PSU_EN" at 35.282,44.1 h1
  text "Pull Up" at 35.575,42.8 h1
  text "P-MT3620EXMSTLP-1-0" at 5.837,42.3 h1.6
  text "USB Power Only" at 5.7,40.944 h1.3
  text "PD" at 31.7,39.5 h1
  text "PMU_EN" at 27.2,39.478 h1
  text "MT3620 - SWD" at 41.483,36 h1.52 r90
  text "3V3" at 34.244,31.6 h1
  text "Sense" at 36.563,31.603 h1
  text "3V3 / RTC" at 31.734,31.3 h1
  text "+" at 5.243,27.393 h1.2
  text "Sense" at 31.272,25 h1
  text "3V3" at 34.544,25 h1
  text "3V3 / MT3620" at 36.715,24.6 h1
  text "-" at 5.352,24.369 h1.2
  text "STM32 -  / LEDs" at 23.542,18.777 h1.25
  text "MT3620 - RESET" at 31,18.114 h1.25
  text "STM32 -" at 0.6,14.714 h1.3
  text "SPARE" at 4.3,13.814 h1.3
  text "STM32 - SWD" at 41.483,10.4 h1.52 r90
  text "STM32 - A" at 10.16,8.396 h1.25
  text "STM32 - B" at 24.13,8.396 h1.25
  text "STM32 - RESET" at 36.068,8.142 h1.25
  text "GND" at 4.5,5.014 h1.3
  text "GND" at 46.787,4.8 h1.25 r90
  text "PA7" at 4.7,3.7 h1.3
  text "PB0" at 4.7,2.414 h1.3
  text "PB1" at 4.8,1.1 h1.3
  text "D" at 49.1,0.7 h0.4
Bottom Overlay:
  region: 10,60 35,60 35,46 10,46
Board Outline (31):
  lines w0.2: 0,0.7 ccw(c0.7,0.7) 0.7,0 49.2,0 ccw(c49.2,0.8) 50,0.8 50,79.3 ccw(c49.3,79.3) 49.3,80 0.8,80 ccw(c0.75,79.25) 0,79.3 0,0.7